# Altium PCB PCB1.PcbDoc
Units mm, origin at the board's own origin, x right, y up, seen from the top; angles counter-clockwise.
Board outline 54.23 x 26.54 mm, 2 copper layers (Top Layer, Bottom Layer); 23 components, 16 nets, 60 pads, 13 vias.
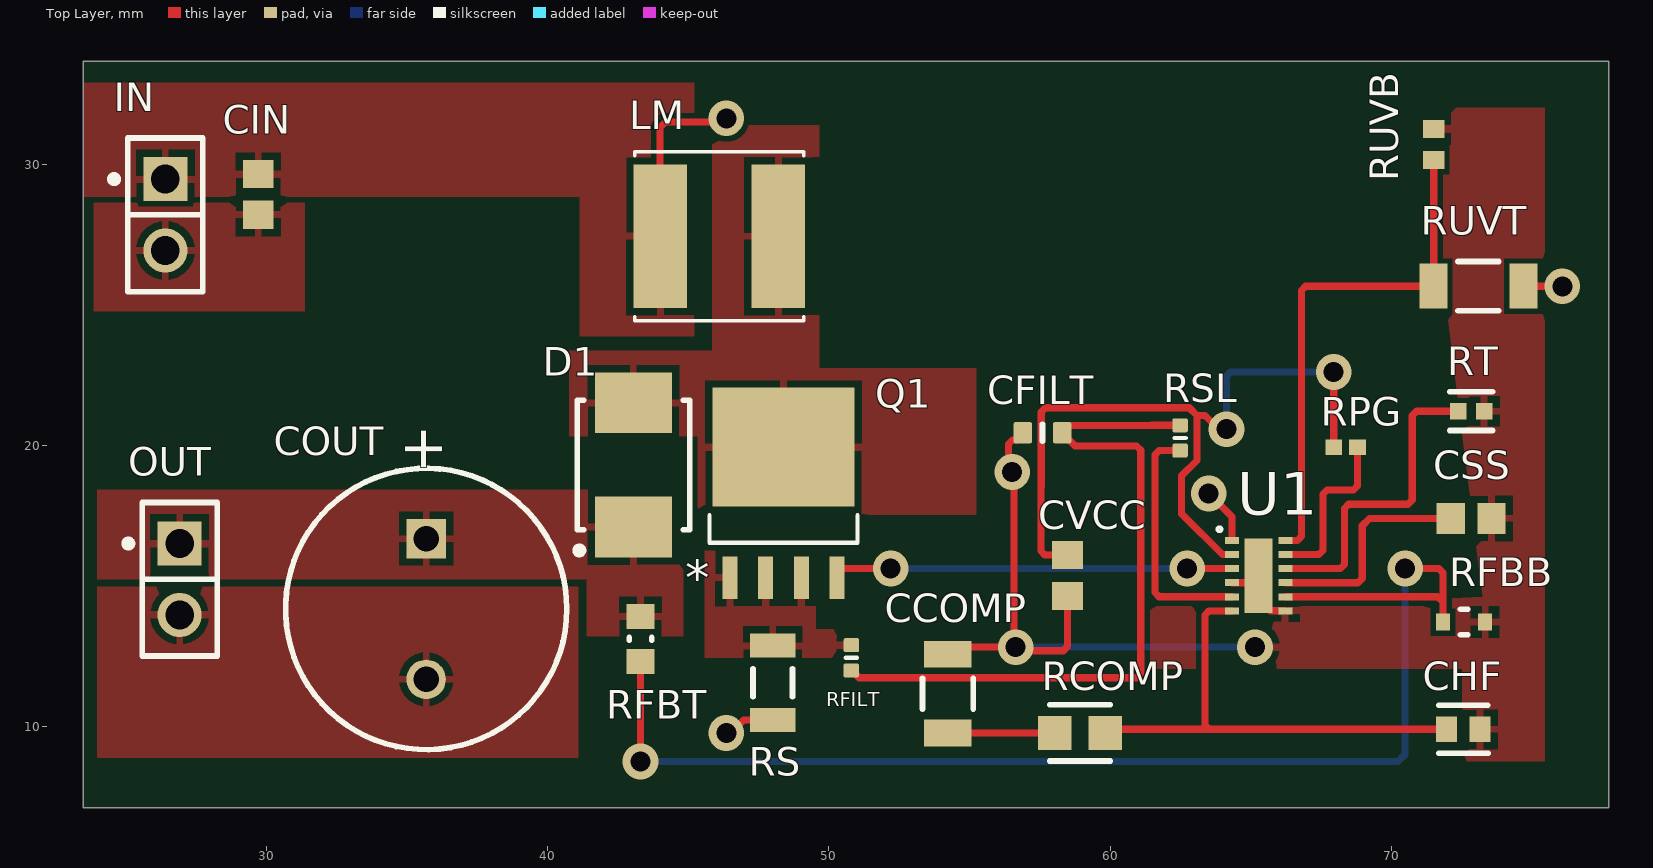
[diagram p0: Top Layer view]
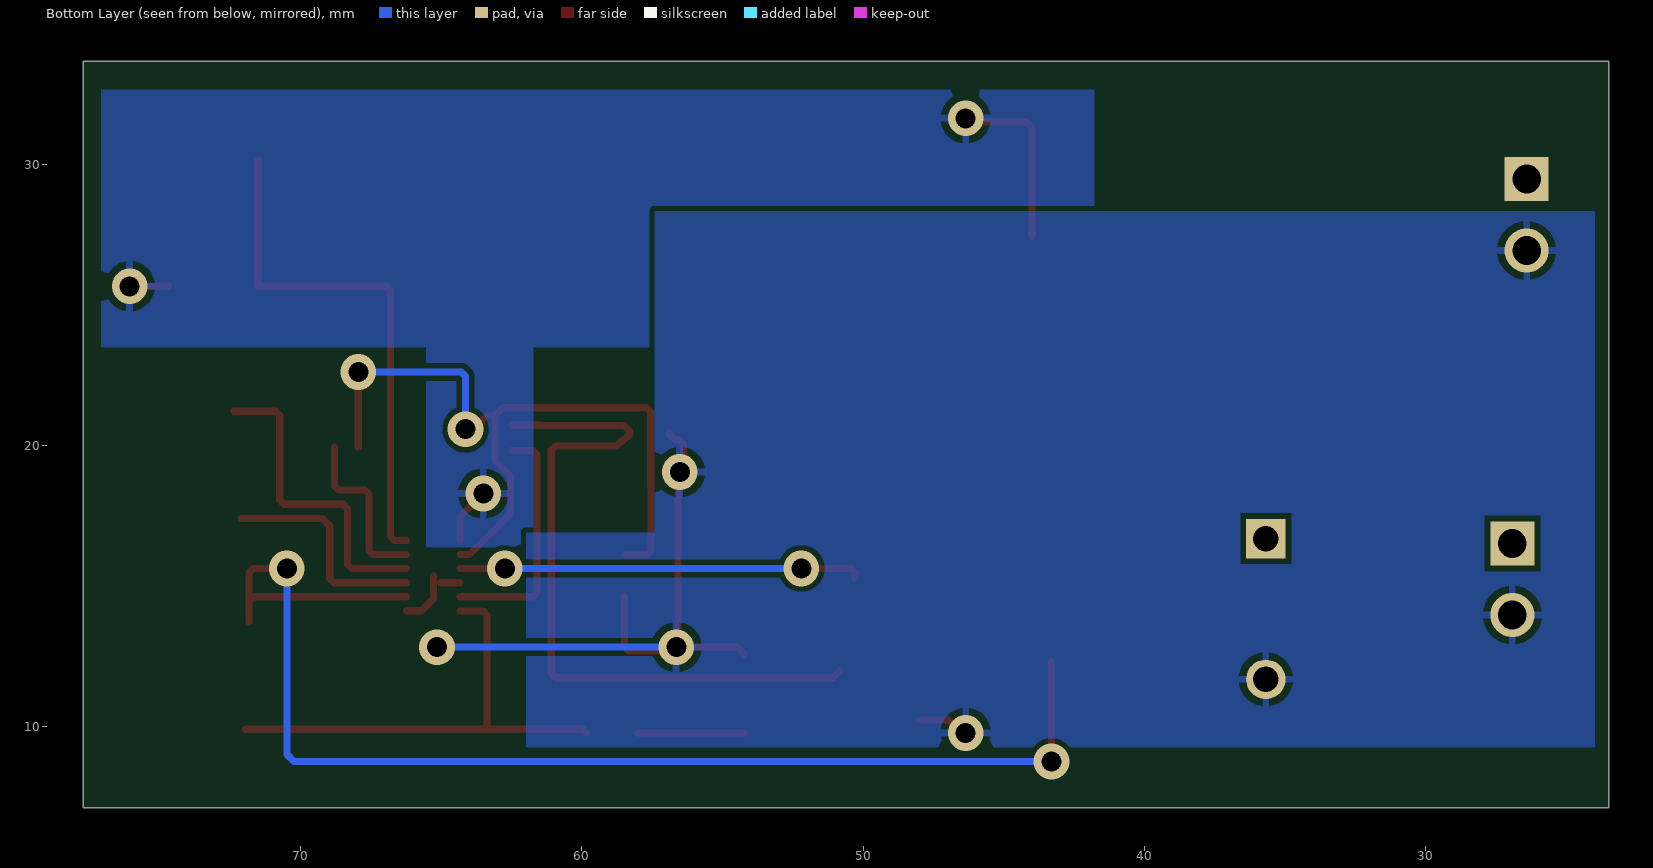
[diagram p1: Bottom Layer view, seen from below]
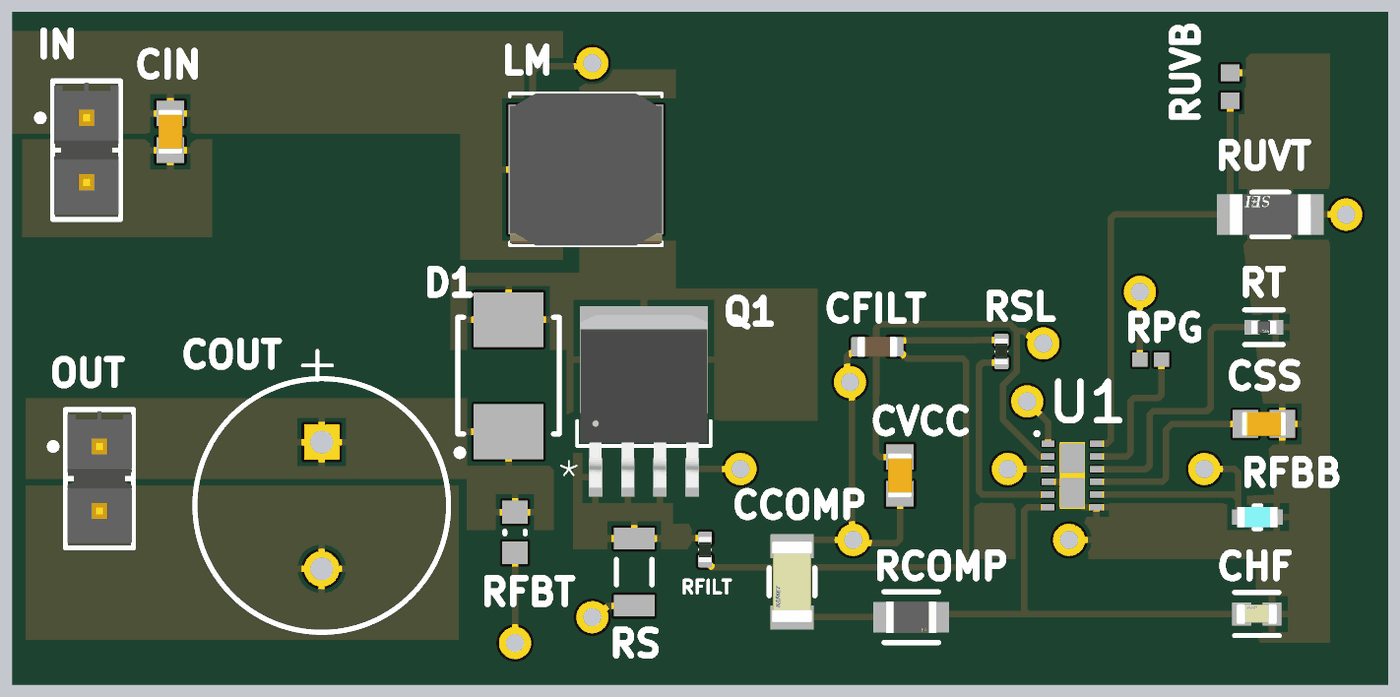
[diagram p2: 3D render of the assembled board from above, using the file's embedded part models]

## Layer stack, top to bottom
Top Solder: solder mask 0.0102, Solder Resist, Dk 3.5
Top Layer: signal copper 0.0356
Dielectric 1: dielectric 0.32, FR-4, Dk 4.8
Bottom Layer: signal copper 0.0356
Bottom Solder: solder mask 0.0102, Solder Resist, Dk 3.5

## Board outline
23.495,7.112 77.724,7.112 77.724,33.655 23.495,33.655

## Design rules (kind name [scope] priority, off if disabled: settings)
Clearance [All] p1: gap=0.198 ignorepadtopadclearanceinfootprint=FALSE
MinimumSolderMaskSliver [All] p1: minsoldermaskwidth=0.1
PolygonConnect [All] p1: connectstyle=Relief reliefconductorwidth=0.254 reliefentries=4 polygonreliefangle="90 Angle" airgapwidth=0.254
RoutingVias [All] p1: holewidth=0.711 width=1.27 viastyle="Through Hole" minholewidth=0.711 minwidth=1.27 maxholewidth=0.711 maxwidth=1.27
SilkToSilkClearance [All] p1: silktosilkclearance=0.15
SilkToSolderMaskClearance [IsPad] p1: minsilkscreentomaskgap=0.1 clearancetoexposedcopper=TRUE
SolderMaskExpansion [All] p1: expansion=0.102 istentingtop=FALSE
SupplyNets "Schematic Supply Nets_2" [InNet('GND')] p1: voltage=0.000
SupplyNets "Schematic Supply Nets_1" [InNet('12V')] p2: voltage=0.000
SupplyNets "Schematic Supply Nets" [InNet('VCC')] p3: voltage=0.000
Width [All] p1: maxlimit=0.254 minlimit=0.254 preferedwidth=0.254
27 further rules are at their usual default settings.

## Components (designator, comment, footprint, x,y, rotation, side; value= is the part's Value field where it differs from the comment)
CCOMP "3.9nF" FP-C1206C-EB-MFG 54.229,11.176 r90 top value="3,900 pF"
CFILT "100pF" CAPC0603(1608)100_L 57.593,20.447 r180 top
CHF "3pF" FP-C0603C-CF-MFG 72.552,9.906 r0 top value="3.0 pF"
CIN "Capacitor 1uF +/- 10% 16V 0603" CAPC1608X90X35ML15T15 29.718,28.919 r270 top value=1µF
COUT "100uF" CAPPR65-500-1600X1000X1700 35.687,14.184 r270 top value=100µF
CSS "Capacitor 1uF +/- 10% 16V 0603" CAPC1608X90X35ML15T15 72.832,17.403 r0 top value=3.3uF
CVCC "Capacitor 1uF +/- 10% 16V 0603" CAPC1608X90X35ML15T15 58.481,15.371 r270 top value=1µF
D1 "MBRS1100T3G" ONSC-SMB-2-403A-03_H_V 43.053,19.304 r90 top
IN "TSW-102-14-G-S" FP-TSW-102-14-G-S-MFG 26.416,28.194 r270 top
LM "VLS6045EX-151M" IND_VLS6045EX-151M 46.101,27.432 r0 top
OUT "TSW-102-14-G-S" FP-TSW-102-14-G-S-MFG 26.924,15.24 r270 top
Q1 "SQJA70EP-T1_GE3" SOT_6EP-T1_GE3_VIS 48.387,18.898 r0 top
RCOMP "590k" FP-TFCR0805-MFG 58.928,9.779 r180 top
RFBB "8.06k" FP-RK73H1J-MFG 72.578,13.72 r0 top
RFBT "470k" RESC0603(1608)_N 43.307,13.119 r270 top value="470000.00 Ohm"
RFILT "Resistor 100R +/-1 % 0402 63 mW" RESC0402(1005)_L 50.8,12.446 r90 top value=100
RPG "24.9k" RESC1005X40X25NL05T10 68.37,19.939 r180 top
RS "174m" RESC3116X65X40LL10T20 48.006,11.557 r90 top
RSL "Resistor 2K +/-5 % 0402 63 mW" RESC0402(1005)_L 62.484,20.262 r90 top value=2k
RT "48.7k" FP-RN73R1E-IPC_B 72.832,21.213 r0 top
RUVB "21.5k" RESC0402(1005)_M 71.501,30.692 r90 top value="21500.00 Ohm"
RUVT "130k" FP-RMCF1206-MFG 73.086,25.658 r180 top
U1 "LM5155DSSR" DSS0012B 65.278,15.367 r0 top

## Footprints (in the part's own frame and the unit in brackets; to place one, negate y for a bottom-side part, rotate by r counter-clockwise, add the part's x,y. Pads: shape width x height; smd on the part's side, far side on the other; paste and mask are expansions set on the pad)
CAPC0603(1608)100_L [mm] "Chip Capacitor, Body 1.6x0.8mm, Height 1.0mm, IPC High Density"
  rrect25% 0.66x0.76 smd: 1(-0.7,0) 2(0.7,0)
  silkscreen extent 0,-0.3 0,0.3, body extent -0.8,-0.4 0.8,0.4, height 0.95
CAPC1608X90X35ML15T15 [mm] "Chip Capacitor, 2-Leads, Body 1.75x0.95mm, IPC Low Density"
  rect 1x1.1 smd: 1(-0.725,0) 2(0.725,0)
  body extent -0.87,-0.48 0.87,0.48, height 0.9
CAPPR65-500-1600X1000X1700 [mm] "THD, 2-Leads, Dia 10mm, Body Length 16mm"
  rect 1.4x1.4 hole 0.9: 1(-2.5,0)
  round 1.4 hole 0.9: 2(2.5,0)
  silkscreen extent -5,-5 5,5, body extent -5,-5 4.95,5, height 17
DSS0012B [mm]
  rect 0.5x0.25 smd paste+0 mask+0.05: 1(-0.95,1.25) 2(-0.95,0.75) 3(-0.95,0.25) 4(-0.95,-0.25) 5(-0.95,-0.75) 6(-0.95,-1.25) 7(0.95,-1.25) 8(0.95,-0.75) 9(0.95,-0.25) 10(0.95,0.25) 11(0.95,0.75) 12(0.95,1.25)
  rect 1x2.65 smd paste-0.5 mask+0: 13(0,0)
  silkscreen extent -1.47,1.57 -1.32,1.73
FP-C0603C-CF-MFG [mm]
  rect 0.75x0.9 smd paste+0 mask+0: 1(-0.6,0) 2(0.6,0)
  silkscreen extent -0.87,-0.85 0.88,0.85, body extent -1.2,-0.6 1.2,0.6, height 0.25
FP-C1206C-EB-MFG [mm]
  rect 0.95x1.7 smd paste+0 mask+0: 1(-1.4,0) 2(1.4,0)
  silkscreen extent -0.55,-0.9 0.55,0.9, body extent -2,-1 2,1, height 0.25
FP-RK73H1J-MFG [mm]
  rect 0.5x0.6 smd paste+0 mask+0: 1(-0.75,0) 2(0.75,0)
  silkscreen extent -0.13,-0.45 0.13,0.45, body extent -1.1,-0.55 1.1,0.55, height 0.25
FP-RMCF1206-MFG [mm]
  rect 1x1.6 smd paste+0 mask+0: 1(-1.6,0) 2(1.6,0)
  silkscreen extent -0.72,-0.87 0.72,0.87, body extent -2.2,-0.97 2.2,0.97, height 0.25
FP-RN73R1E-IPC_B [mm]
  rect 0.588x0.572 smd paste+0 mask+0: 1(-0.464,0) 2(0.464,0)
  silkscreen extent -0.76,-0.69 0.76,0.69, body extent -0.91,-0.44 0.91,0.44, height 0.25
FP-TFCR0805-MFG [mm]
  rect 1.2x1.2 smd paste+0 mask+0: 1(-0.9,0) 2(0.9,0)
  silkscreen extent -1.07,-1 1.07,1, body extent -1.6,-0.8 1.6,0.8, height 0.25
FP-TSW-102-14-G-S-MFG [mm]
  rect 1.57x1.57 hole 1.02 paste-2539.97 mask+0: 1(-1.27,0)
  round 1.57 hole 1.02 paste-2539.97 mask+0: 2(1.27,0)
  silkscreen extent -2.73,-1.95 2.73,1.34, body extent -2.83,-1.44 2.83,1.44, height 0.25
IND_VLS6045EX-151M [mm]
  rect 1.9x5.1 smd: 1(-2.1,0) 2(2.1,0)
  silkscreen extent -3,-3 3,3, body extent -3,-3 3,3, height 4.5
ONSC-SMB-2-403A-03_H_V [mm] "Molded, 2-Leads, Body 4.6x3.95mm"
  rect 2.159x2.743 smd: 1(-2.21,0) 2(2.21,0)
  silkscreen extent -3.16,-2 2.3,2.05, body extent -2.3,-1.97 2.3,1.97, height 2.42
RESC0402(1005)_L [mm] "Chip Resistor, Body 1.0x0.5mm, IPC High Density"
  rrect25% 0.5x0.55 smd: 1(-0.45,0) 2(0.45,0)
  silkscreen extent 0,-0.2 0,0.2, body extent -0.5,-0.25 0.5,0.25, height 0.3
RESC0402(1005)_M [mm] "Chip Resistor, Body 1.0x0.5mm, IPC Low Density"
  rect 0.65x0.75 smd: 1(-0.55,0) 2(0.55,0)
  body extent -0.52,-0.28 0.53,0.28, height 0.4
RESC0603(1608)_N [mm] "Chip Resistor, Body 1.6x0.8mm, IPC Medium Density"
  rect 0.9x1 smd: 1(-0.8,0) 2(0.8,0)
  silkscreen extent -0.05,-0.4 0.05,0.4, body extent -0.85,-0.47 0.85,0.47, height 0.6
RESC1005X40X25NL05T10 [mm] "Chip Resistor, 2-Leads, Body 1.00x0.50mm, IPC Medium Density"
  rect 0.6x0.55 smd: 1(-0.425,0) 2(0.425,0)
  body extent -0.53,-0.27 0.53,0.28, height 0.4
RESC3116X65X40LL10T20 [mm] "Chip Resistor, 2-Leads, Body 3.10x1.60mm, IPC High Density"
  rect 0.85x1.6 smd: 1(-1.325,0) 2(1.325,0)
  silkscreen extent -0.5,-0.7 0.5,0.7, body extent -1.6,-0.85 1.6,0.85, height 0.65
SOT_6EP-T1_GE3_VIS [mil]
  rect 20.97x59.56 smd paste+0 mask+0: 2(-75,-142) 2(-25,-142) 2(25,-142) 4(75,-142)
  rect 199x166 smd paste+0 mask+0: 5(0,41)
  silkscreen extent -104,-93 104,-54, body extent -99,-158 99,110, height 67

## Part data
CCOMP: library part CMP-03020-021801-1, "C1206 3,900 pF C0G 5.00% 250 V", Capacitance="3,900 pF", Manufacturer=KEMET, Manufacturer Part Number=C1206C392JAGACTU, Package=C1206C-EB, Temperature="-55°C to +150°C", Temperature Characteristic=C0G, Temperature Coefficient=15%, Temperature Range High=+150°C, Temperature Range Low=-55°C, Tolerance=0.05, Voltage Rating="250 V", Automotive=Yes, Automotive Grade="Grade 0", Category=Cap, ComponentLink2Description=Datasheet, ComponentLink2URL=https://content.kemet.com/datasheets/KEM_C1007_X8R_ULTRA_150C_SMD.pdf, Device Class L1="Passive Components", Device Class L2=Capacitors, Device Class L3="Ceramic Capacitors", Height=0.88mm, Ipc Land Pattern Name=CAPC320160X78, Lead Free=Yes, Material=Ceramic, Mouser Description="Multilayer Ceramic Capacitors MLCC - SMD/SMT 250volts 3.9nF 5% C0G", Octopart=https://octopart.com/c1206c392jagactu-kemet-88376556, RoHS=TRUE
CFILT: library part CMP-001-00076-4, "Chip Capacitor, 4.7µF +/-20%, 10V, 0603, Thickness 1 mm", Case/Package=0603, Max Operating Temperature=85°C, Min Operating Temperature=-55°C, Tolerance=10%, Voltage Rating=10V, Mounting Technology=SMT, Pins=2
CHF: library part CMP-03020-033445-1, "CAP CER 3PF 50V NP0 0603", Capacitance="3.0 pF", Manufacturer=KEMET, Manufacturer Part Number=C0603C309D5GAC7867, Package=C0603C-CF, Temperature="-55°C to +125°C", Temperature Characteristic=C0G, Temperature Coefficient=30ppm/°C, Temperature Range High=+125°C, Temperature Range Low=-55°C, Tolerance="0.5 pF", Voltage Rating="50 V", Automotive=Yes, Automotive Grade="Grade 1", Category=Cap, ComponentLink2Description=Datasheet, ComponentLink2URL=https://api.kemet.com/component-edge/download/datasheet/C0603C100J5GACAUTO.pdf, Device Class L1="Passive Components", Device Class L2=Capacitors, Device Class L3="Ceramic Capacitors", Digikey Description="CAP CER 3PF 50V NP0 0603", Height=0.87mm, Lead Free=Yes, Material=Ceramic, Octopart=https://octopart.com/c0603c309d5gac7867-kemet-1990531, RoHS=TRUE
CIN CSS CVCC: library part CMP-001-00004-6, "Chip Capacitor, 1 uF, +/- 10%, 16 V, 0603 (1608 Metric)", Capacitor Type=Ceramic, Case/Package=0603, Max Operating Temperature=125°C, Min Operating Temperature=-55°C, Tolerance=10%, Voltage Rating=16V, Mounting Technology=SM, Pins=2, RoHS Compliant=True
COUT: library part CMP-001-00034-7, "Aluminum Electrolytic Capacitor, 100 uF, +/- 20%, 100 V, -40 to 85 degC, 2-Pin THD, RoHS, Bulk", Capacitor Type=Electrolytic, Case/Package=Radial, Manufacturer=Panasonic, Max Operating Temperature=85°C, Min Operating Temperature=-40°C, Package Description="2-Pin Through Hole Device, Dia 10 mm, Body Length 16 mm", Package Quantity=200, Package Reference=CAPPR65-500-1600X1000X1700, Ripple Current=350mA, Tolerance=20%, Voltage Rating=100V, Datasheet URL=https://industrial.panasonic.com/cdbs/www-data/pdf/RDF0000/ABA0000C1047.pdf, Datasheet Version=Mar-16, Diameter=10mm, Lead Pitch=5mm, Manufacturer URL=http://www.panasonic.com/, Mounting Technology=TH, Packaging=Bulk, Pins=2, Ripple Current (AC)=350mA, RoHS Compliant=True
D1: library part CMP-1055-00351-1, "Schottky Power Rectifier, Surface Mount Power Package, 2-Pin SMB, Pb-Free, Tape and Reel", Manufacturer="On Semiconductor", ComponentLink1Description="Manufacturer URL", ComponentLink1URL=http://www.onsemi.com/, ComponentLink2Description=Datasheet, ComponentLink2URL=http://www.onsemi.cn/pub_link/Collateral/MBRS1100T3-D.PDF, ComponentLink3Description="Package Specification", ComponentLink3URL=http://www.onsemi.com/pub_link/Collateral/1SMB5913BT3-D.PDF, Configuration=Single, DatasheetVersion="Rev. 10", IFSM Max (A)=50, Mounting Technology="Surface Mount", PackageDescription="2-Pin Small Molded Package, J-Bend Lead, Body 4.33 x 3.625 mm", PackageReference=SMB-2-403A-03_H, PackageVersion="Rev. H, 05/2011", Packing="Tape and Reel", PartNumber=MBRS1100T3G, RoHS=TRUE
IN OUT: library part CMP-02766-001740-1, "CONN HEADER VERT 2POS 2.54MM", Color=Black, Flammability Rating="UL94 V-0", Max Current Rating=7.6A, Max Operating Temperature=125°C, Max Voltage Rating (AC)=550V, Min Operating Temperature=-55°C, Package Quantity=1, Connector Type=Header, Contact Finish - Mating=GOLD, Contact Material=Bronze, Contact Mating Length=0.32inch, Contact Plating=Gold, Contact Shape=Square, Contact Type="Male Pin", Depth=2.54mm, Fastening Type=Pull, Gender=Male, Housing Color=Black, Housing Material=Polyester, Insulation Color=Black, Insulation Material=PBT, Lead Free="Lead Free", Length=5.08mm, Mount="Through Hole", Number of Contacts=2, Number of Positions=2, Number of Rows=1, Orientation=Straight, Packaging=Bulk, Pitch=2.54mm, Radiation Hardening=No, REACH SVHC="No SVHC", RoHS Compliant=Yes, Series=TSW, Termination=Solder, Width=2.54mm
LM: "Inductor Power Shielded Wirewound 150uH 20% 100KHz Ferrite 700mA 760mOhm DCR 2424 T/R", Package="NON STANDARD-2 TDK", Availability="In Stock", Check_prices=https://www.snapeda.com/parts/VLS6045EX-151M/TDK/view-part/?ref=eda, MF=TDK, MP=VLS6045EX-151M, Price=None, Purchase-URL=https://pricing.snapeda.com/search/part/VLS6045EX-151M/?ref=eda, SnapEDA_Link=https://www.snapeda.com/parts/VLS6045EX-151M/TDK/view-part/?ref=snap
Q1: "N-CHANNEL 100-V (D-S) 175C MOSFET", Manufacturer_Name=Vishay, Copyright="Copyright (C) 2026 Ultra Librarian. All rights reserved.", Manufacturer_Part_Number=SQJA70EP-T1_GE3
RCOMP: library part CMP-250906-134917-1, "RES Thin Film,  8.45kΩ, 0.5%, 0.1W, 25ppm/°C, 0805"
RFBB: library part CMP-04015-089182-1, "8.06kΩ ±0.5% 0.1W Chip Resistor 0603 Thick Film AEC-Q200 Qualified", Case Code (Imperial)=0603, Case Code (Metric)=1608, Max Operating Temperature=155°C, Min Operating Temperature=-55°C, Package Quantity=5000, Power Rating=100mW, Resistance=8.06kR, Resistor Type="Thick Film", Temperature Coefficient=100ppm/°C, Tolerance=0.5%, Voltage Rating=50V, Case/Package=0603, Height=0.45mm, Lead Free="Lead Free", Length=1.6mm, Packaging="Tape and Reel", RoHS Compliant=Yes, Series=RK73H, Termination=SMD/SMT, Voltage Rating (DC)=50V, Width=0.8mm
RFBT: library part CMP-1012-00138-1, "470K 0.1W 5% 0603 (1608 Metric)  SMD", Case-EIA=0603, Case-Metric=1608, Power="0.1 W", Tolerance="5 %", Technology=SMT
RFILT: library part CMP-009-00167-3, "Chip Resistor, 100 Ohms, +/-1 %, 63 mW, -55 to 155 degC, 0402", Case/Package=0402, Max Operating Temperature=155°C, Min Operating Temperature=-55°C, Power=63mW, Tolerance=1%, Pins=2
RPG: library part CMP-2002-07531-1, Manufacturer="Yageo / Phycomp", Part Number=RC0402FR-07249KL
RS: library part CMP-2003-04964-1, Manufacturer=Yageo, Part Number=RC1206FR-10750RL
RSL: library part CMP-009-00138-3, "Chip Resistor, 2 kOhms, +/-5 %, 63 mW, -55 to 155 degC, 0402", Case/Package=0402, Max Operating Temperature=155°C, Min Operating Temperature=-55°C, Power=63mW, Tolerance=5%, Pins=2
RT: library part CMP-04015-053512-1, "48.7kΩ ±1% 0.063W, 1/16W Chip Resistor 0402 (1005 Metric) Moisture Resistant Thin Film"
RUVB: library part CMP-1011-00658-1, "21K5 0.063W 1% 0402 (1005 Metric)  SMD", Case-EIA=0402, Case-Metric=1005, Power="0.063 W", Tolerance="1 %", Technology=SMT
RUVT: library part CMP-26527-004485-1, "130kΩ ±5% 0.25W 1206 Thick Film Chip Resistor AEC-Q200 compliant", Case Code (Imperial)=1206, Case Code (Metric)=3216, Max Operating Temperature=155°C, Max Power Dissipation=250mW, Min Operating Temperature=-55°C, Resistance=130kR, Resistor Type="Thick Film", Temperature Coefficient=200ppm/°C, Tolerance=5%, Case/Package=1206, Contact Plating=Tin, Features="Automotive AEC-Q200", Height=0.028inch, Lead Free="Lead Free", Length=0.126inch, Mount="Surface Mount", Number of Terminations=2, Packaging="Tape and Reel", Radiation Hardening=No, RoHS Compliant=Yes, Series=RMCF, Width=0.063inch
U1: "2.2-MHz wide VIN, 1.5-A MOSFET driver, non-synchronous boost controller 12-WSON -40 to 125", Manufacturer_Name="Texas Instruments", Copyright="Copyright (C) 2025 Ultra Librarian. All rights reserved.", Manufacturer_Part_Number=LM5155DSSR, RefDes=RefDes, TYPE=TYPE

## Via types
v1: diameter 1.27, hole 0.711, Top Layer to Bottom Layer, 13 vias

## Nets (pads, with @x,y where several pads share a name; then routed paths per layer and width w, separated by ;. In a path a pad name is that pad's centre, name@x,y a point inside that pad or via, vN(x,y) a via of type N, cw(c..) or ccw(c..) an arc to the next point about the centre after c; other vN are vias at no path point)
12V: CIN.1 IN.1 LM.1 RUVT.1 U1.1 | length 9.8
  Top Layer w0.254: LM.1 44.001,31.301 44.196,31.496 46.228,31.496 v1(46.355,31.623) ; v1(63.5,18.288) 64.328,17.46 U1.1 ; RUVT.1 74.69,25.654 v1(76.073,25.654)
GND: CCOMP.2 CFILT.2 CHF.2 CIN.2 COUT.2 CSS.2 CVCC.2 IN.2 OUT.2 RFBB.2 RS.1 RT.2 RUVB.2 U1.4 U1.7 U1.13 | length 27.3
  Top Layer w0.254: v1(46.355,9.779) 46.52,9.779 46.973,10.232 RS.1 ; CCOMP.2 54.48,12.827 v1(56.642,12.827) ; CFILT.2 56.893,20.397 56.69,20.194 56.537,20.194 56.388,20.045 56.388,19.177 56.578,18.986 56.578,12.89 v1(56.642,12.827) ; CVCC.2 58.481,12.849 58.332,12.7 56.769,12.7 v1(56.642,12.827) ; U1.4 U1.13@65.028,15.117 ; U1.13 65.278,14.542 65.701,14.119 66.226,14.119 U1.7
  Bottom Layer w0.254: v1(56.642,12.827) v1(65.151,12.827)
  other v1: 56.515,19.05
NetCCOMP_1: CCOMP.1 RCOMP.2 | length 3.8
  Top Layer w0.254: CCOMP.1 54.232,9.779 RCOMP.2
NetCFILT_1: CFILT.1 RFILT.1 RSL.2 | length 25.8
  Top Layer w0.254: RFILT.1 50.825,11.996 51.081,11.74 60.938,11.74 61.087,11.889 61.087,19.833 60.938,19.981 58.759,19.981 58.546,20.194 58.496,20.194 58.293,20.397 CFILT.1 ; CFILT.1@58.293,20.497 58.496,20.7 58.644,20.7 58.645,20.701 61.468,20.701 61.479,20.712 RSL.2
NetCHF_1: CHF.1 RCOMP.1 U1.6 | length 17.3
  Top Layer w0.254: RCOMP.1 59.955,9.906 63.522,9.906 ; U1.6 63.522,14.117 63.373,13.968 63.373,10.055 63.522,9.906 ; CHF.1 63.522,9.906
NetCSS_1: CSS.1 U1.9 | length 7.9
  Top Layer w0.254: U1.9 68.812,15.117 68.961,15.266 68.961,17.145 69.219,17.403 CSS.1
NetD1_2: D1.2 LM.2 Q1.5
NetQ1_2: Q1.2 RFILT.2 RS.2
NetQ1_4: Q1.4 U1.3 | length 14.3
  Top Layer w0.254: Q1.4 50.292,15.482 50.431,15.621 v1(52.197,15.621) ; v1@62.738,15.619 64.326,15.619 U1.3
  Bottom Layer w0.254: v1(52.197,15.621) v1(62.738,15.621)
NetRFBB_1: RFBB.1 RFBT.2 U1.8 | length 46.3
  Top Layer w0.254: v1(43.307,8.763) RFBT.2 ; U1.8 71.64,14.617 71.828,14.429 ; v1(70.485,15.621) 71.679,15.621 71.828,15.472 71.828,14.429 ; RFBB.1 71.828,14.429
  Bottom Layer w0.254: v1(43.307,8.763) 70.231,8.763 70.485,9.017 v1(70.485,15.621)
NetRPG_1: RPG.1 U1.11 | length 6.1
  Top Layer w0.254: U1.11 67.415,16.117 67.564,16.266 67.564,18.266 67.713,18.415 68.646,18.415 68.795,18.564 RPG.1
NetRSL_1: RSL.1 U1.5 | length 8.6
  Top Layer w0.254: RSL.1 61.744,19.812 61.595,19.663 61.595,14.766 61.744,14.617 U1.5
NetRT_1: RT.1 U1.10 | length 11.4
  Top Layer w0.254: U1.10 68.177,15.617 68.326,15.766 68.326,17.758 68.475,17.907 70.59,17.907 70.739,18.056 70.739,21.064 70.888,21.213 RT.1
NetRUVB_1: RUVB.1 RUVT.2 U1.12 | length 18.6
  Top Layer w0.254: U1.12 66.23,16.619 66.653,16.619 66.802,16.768 66.802,25.505 66.951,25.654 71.482,25.654 RUVT.2 71.501,25.673 RUVB.1
VCC: CVCC.1 RPG.2 U1.2 | length 27.4
  Top Layer w0.254: CVCC.1 57.691,16.096 57.542,16.245 57.542,18.531 57.548,18.537 57.548,21.187 57.697,21.336 62.808,21.336 63.084,21.06 ; v1(64.135,20.574) 63.86,20.574 63.374,21.06 63.084,21.06 ; U1.2 64.326,16.119 63.991,16.119 62.54,17.57 62.54,18.92 63.084,19.464 63.084,21.06 ; RPG.2 v1(67.945,22.606)
  Bottom Layer w0.254: v1(64.135,20.574) 64.135,22.457 64.284,22.606 v1(67.945,22.606)
VOUT: COUT.1 D1.1 OUT.1 RFBT.1

## Polygon pours and split planes (outlines as drawn)
GND on Top Layer "GND_L01_P015" (solid, pour order 15): 61.341,17.272 67.056,17.272 67.056,12.065 61.341,12.065
GND on Top Layer "GND_L01_P010" (solid, pour order 10): 66.675,14.351 65.913,14.351 65.913,12.065 72.517,12.065 72.517,8.763 75.438,8.763 75.438,32.004 71.08,32.004 73.238,14.614
12V on Top Layer "12V_L01_P003" (solid, pour order 3): 45.212,31.496 45.212,31.369 45.212,31.115 45.212,23.876 41.148,23.876 41.148,24.511 41.148,24.892 41.148,28.829 23.495,28.829 23.495,29.718 23.495,32.893 45.212,32.893 45.212,31.115
GND on Top Layer "GND_L01_P008" (solid, pour order 8): 24.003,14.969 41.091,14.969 41.091,8.89 24.003,8.89
GND on Top Layer "GND_L01_P007" (solid, pour order 7): 31.369,28.702 31.369,24.765 23.876,24.765 23.876,28.702
VOUT on Top Layer "VOUT_L01_P006" (solid, pour order 6): 44.831,13.208 41.402,13.208 41.402,15.24 24.003,15.24 24.003,18.415 44.831,18.415 44.704,18.288 44.831,18.415
NetQ1_2 on Top Layer "NETQ1_2_L01_P005" (solid, pour order 5): 45.593,16.256 49.53,16.256 49.53,13.462 51.562,13.462 51.562,12.446 45.593,12.446
NetD1_2 on Top Layer "NETD1_2_L01_P002" (solid, pour order 2): 49.657,31.369 49.657,22.733 55.245,22.733 55.245,17.526 45.339,17.526 45.339,20.32 40.767,20.32 40.767,23.368 45.847,23.368 45.847,31.369 46.482,31.369 46.99,31.369
GND on Bottom Layer "GND_L02_P012" (solid, pour order 12): 24.003,9.271 61.976,9.271 61.976,16.891 57.404,16.891 57.404,28.321 24.003,28.321
12V on Bottom Layer "12V_L02_P013" (solid, pour order 13): 47.117,32.639 41.783,32.639 41.783,23.495 61.722,23.495 61.722,16.383 65.532,16.383 65.532,23.495 77.089,23.495 77.089,32.639

## Dimensions
23.495,33.655 to 23.495,7.112 on Mechanical 1
23.495,33.655 to 77.724,33.655 on Mechanical 1

## Text inside footprints (layer, text, board x,y; h text height)
COUT: Top Overlay "+" at 34.937,20.734 h1.5 r270
Q1: Top 3D Body "*" at 46.164,16.281 h1.27; Top Overlay "*" at 44.895,14.656 h1.27